# Altium PCB God68_PCB_Altium.pcbdoc
Units mil, origin at the board's own origin, x right, y up, seen from the top; angles counter-clockwise.
Board outline 14584.13 x 6241.48 mil, 2 copper layers (Top Layer, Bottom Layer); 92 components, 37 nets, 716 pads, 124 vias.
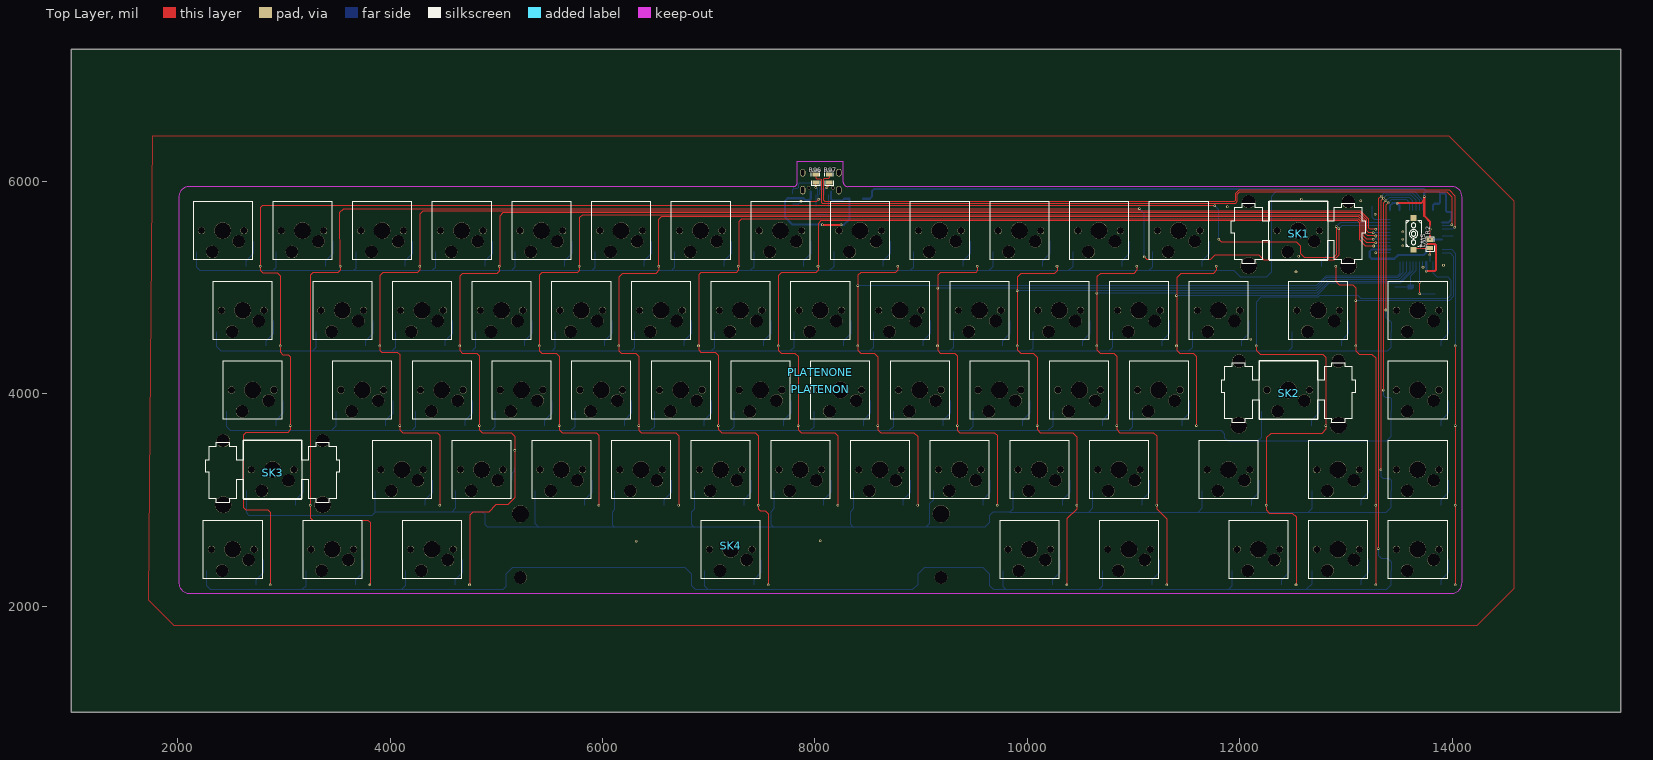
[diagram p0: Top Layer view]
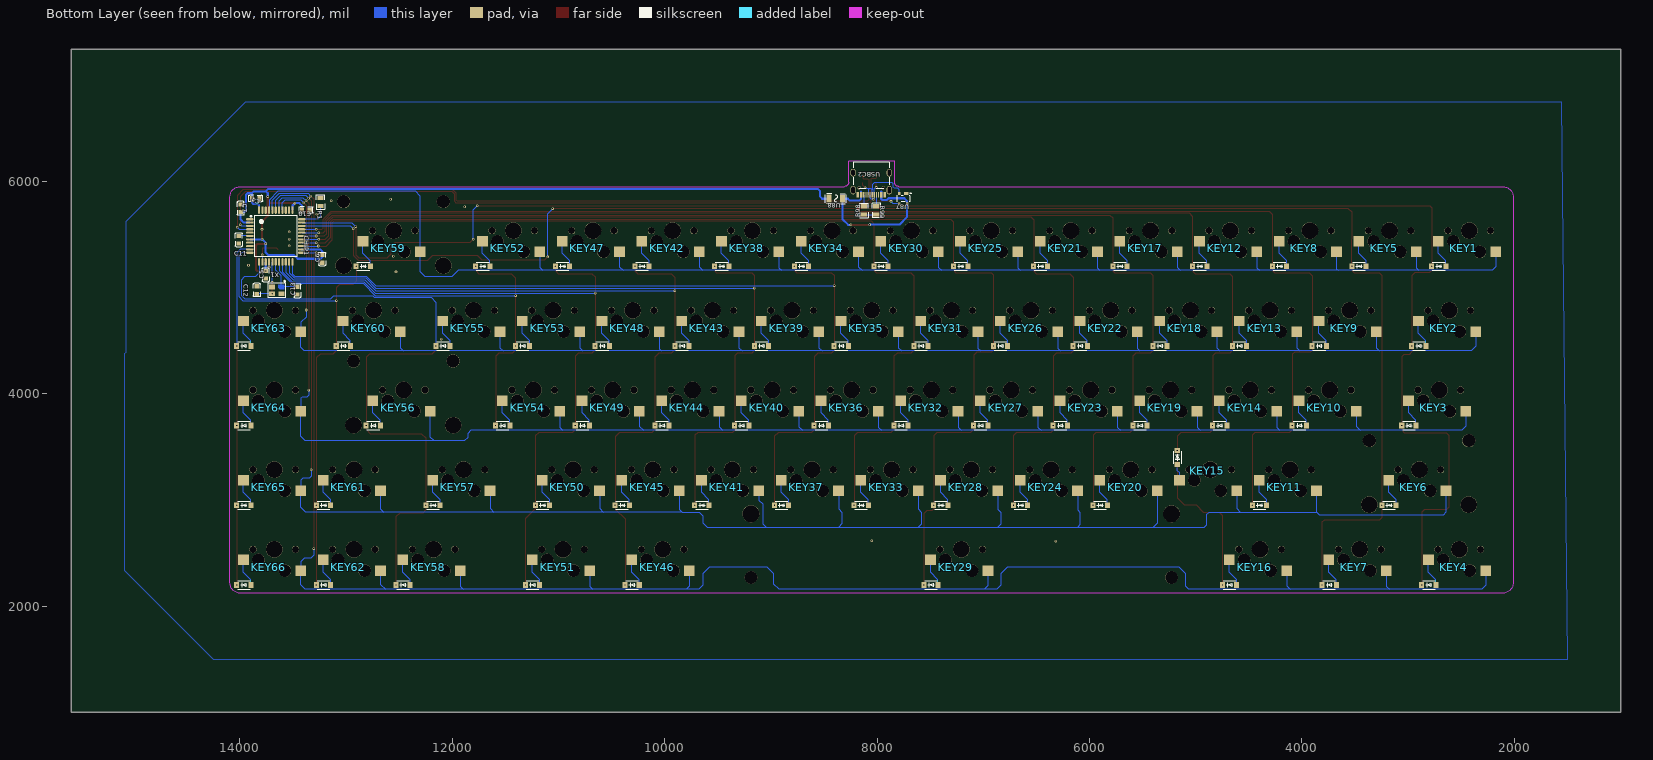
[diagram p1: Bottom Layer view, seen from below]

## Layer stack, top to bottom
Top Layer: signal copper (thickness not stored)
Dielectric: dielectric 12.6, FR-4, Dk 4.8
Bottom Layer: signal copper (thickness not stored)

## Board outline
15584.13,1000 1000,1000 1000,7241.48 15584.13,7241.48

## Components (designator, comment, footprint, x,y, rotation, side; value= is the part's Value field where it differs from the comment)
C4 "100nF" C0603 13849.57,5837.71 r180 bottom
C5 "100nF" C0603 13755.06,5119.02 r270 bottom
C6 "100nF" C0603 13222.58,5268.8 r270 bottom
C7 "470nF" C0603 13990.89,5744.59 r90 bottom
C10 "100nF" C0603 13376.13,5729.43 r180 bottom
C11 "1uF" C0603 14008.01,5449.9 r270 bottom
C12 "22pF" C0603 13838.72,4975.5 r90 bottom
C13 "22pF" C0603 13456.83,4969.59 r270 bottom
CHIP1 "ATMEGA32U4-AU" QFP-44_L10.0-W10.0-P0.80-LS13.2-BL 13660.18,5484.75 r90 bottom
KEY1 "凯华热插拔" 凯华热插拔 2150.36,5809.55 r0 top
KEY2 "凯华热插拔" 凯华热插拔 2337.84,5059.63 r0 top
KEY3 "凯华热插拔" 凯华热插拔 2431.58,4309.71 r0 top
KEY4 "凯华热插拔" 凯华热插拔 2244.1,2809.87 r0 top
KEY5 "凯华热插拔" 凯华热插拔 2900.28,5809.55 r0 top
KEY6 "凯华热插拔" 凯华热插拔 2619.06,3559.79 r0 top
KEY7 "凯华热插拔" 凯华热插拔 3181.5,2809.87 r0 top
KEY8 "凯华热插拔" 凯华热插拔 3650.2,5809.55 r0 top
KEY9 "凯华热插拔" 凯华热插拔 3275.24,5059.63 r0 top
KEY10 "凯华热插拔" 凯华热插拔 3462.72,4309.71 r0 top
KEY11 "凯华热插拔" 凯华热插拔 3837.68,3559.79 r0 top
KEY12 "凯华热插拔" 凯华热插拔 4400.12,5809.55 r0 top
KEY13 "凯华热插拔" 凯华热插拔 4025.16,5059.63 r0 top
KEY14 "凯华热插拔" 凯华热插拔 4212.64,4309.71 r0 top
KEY15 "凯华热插拔" "凯华热插拔 COPY" 4587.63,3559.77 r0 top
KEY16 "凯华热插拔" 凯华热插拔 4118.9,2809.87 r0 top
KEY17 "凯华热插拔" 凯华热插拔 5150.05,5809.55 r0 top
KEY18 "凯华热插拔" 凯华热插拔 4775.08,5059.63 r0 top
KEY19 "凯华热插拔" 凯华热插拔 4962.56,4309.71 r0 top
KEY20 "凯华热插拔" 凯华热插拔 5337.52,3559.79 r0 top
KEY21 "凯华热插拔" 凯华热插拔 5899.97,5809.55 r0 top
KEY22 "凯华热插拔" 凯华热插拔 5525.01,5059.63 r0 top
KEY23 "凯华热插拔" 凯华热插拔 5712.49,4309.71 r0 top
KEY24 "凯华热插拔" 凯华热插拔 6087.45,3559.79 r0 top
KEY25 "凯华热插拔" 凯华热插拔 6649.89,5809.55 r0 top
KEY26 "凯华热插拔" 凯华热插拔 6274.93,5059.63 r0 top
KEY27 "凯华热插拔" 凯华热插拔 6462.41,4309.71 r0 top
KEY28 "凯华热插拔" 凯华热插拔 6837.37,3559.79 r0 top
KEY29 "凯华热插拔" 凯华热插拔 6931.11,2809.87 r0 top
KEY30 "凯华热插拔" 凯华热插拔 7399.81,5809.55 r0 top
KEY31 "凯华热插拔" 凯华热插拔 7024.85,5059.63 r0 top
KEY32 "凯华热插拔" 凯华热插拔 7212.33,4309.71 r0 top
KEY33 "凯华热插拔" 凯华热插拔 7587.29,3559.79 r0 top
KEY34 "凯华热插拔" 凯华热插拔 8149.73,5809.55 r0 top
KEY35 "凯华热插拔" 凯华热插拔 7774.77,5059.63 r0 top
KEY36 "凯华热插拔" 凯华热插拔 7962.25,4309.71 r0 top
KEY37 "凯华热插拔" 凯华热插拔 8337.21,3559.79 r0 top
KEY38 "凯华热插拔" 凯华热插拔 8899.65,5809.55 r0 top
KEY39 "凯华热插拔" 凯华热插拔 8524.69,5059.63 r0 top
KEY40 "凯华热插拔" 凯华热插拔 8712.17,4309.71 r0 top
KEY41 "凯华热插拔" 凯华热插拔 9087.13,3559.79 r0 top
KEY42 "凯华热插拔" 凯华热插拔 9649.57,5809.55 r0 top
KEY43 "凯华热插拔" 凯华热插拔 9274.61,5059.63 r0 top
KEY44 "凯华热插拔" 凯华热插拔 9462.09,4309.71 r0 top
KEY45 "凯华热插拔" 凯华热插拔 9837.05,3559.79 r0 top
KEY46 "凯华热插拔" 凯华热插拔 9743.31,2809.87 r0 top
KEY47 "凯华热插拔" 凯华热插拔 10399.49,5809.55 r0 top
KEY48 "凯华热插拔" 凯华热插拔 10024.53,5059.63 r0 top
KEY49 "凯华热插拔" 凯华热插拔 10212.01,4309.71 r0 top
KEY50 "凯华热插拔" 凯华热插拔 10586.97,3559.79 r0 top
KEY51 "凯华热插拔" 凯华热插拔 10680.72,2809.87 r0 top
KEY52 "凯华热插拔" 凯华热插拔 11149.42,5809.55 r0 top
KEY53 "凯华热插拔" 凯华热插拔 10774.45,5059.63 r0 top
KEY54 "凯华热插拔" 凯华热插拔 10961.93,4309.71 r0 top
KEY55 "凯华热插拔" 凯华热插拔 11524.38,5059.63 r0 top
KEY56 "凯华热插拔" 凯华热插拔 12180.56,4309.71 r0 top
KEY57 "凯华热插拔" 凯华热插拔 11618.12,3559.79 r0 top
KEY58 "凯华热插拔" 凯华热插拔 11899.34,2809.87 r0 top
KEY59 "凯华热插拔" 凯华热插拔 12274.3,5809.55 r0 top
KEY60 "凯华热插拔" 凯华热插拔 12461.78,5059.63 r0 top
KEY61 "凯华热插拔" 凯华热插拔 12649.26,3559.79 r0 top
KEY62 "凯华热插拔" 凯华热插拔 12649.26,2809.87 r0 top
KEY63 "凯华热插拔" 凯华热插拔 13399.18,5059.63 r0 top
KEY64 "凯华热插拔" 凯华热插拔 13399.18,4309.71 r0 top
KEY65 "凯华热插拔" 凯华热插拔 13399.18,3559.79 r0 top
KEY66 "凯华热插拔" 凯华热插拔 13399.18,2809.87 r0 top
PLATENON "_" ?#1 8050.36,4042.88 r0 top
PLATENONE "_" ?#2 8051.48,4201.58 r0 top
R1 "1K" R0805#1 13238.92,5805.61 r270 bottom
R2 "10K" R0805#2 13788.53,5410.43 r90 top
R96 "22" R0805#2 8006.07,6026.68 r270 top
R97 "22" R0805#2 8134.02,6026.68 r270 top
R98 "5.1K" R0805#1 8123.72,5725.47 r270 bottom
R99 "5.1K" R0805#1 8005.58,5725.47 r90 bottom
SK1 "卫星轴" "凯华热插拔 2U" 12274.3,5809.55 r0 top
SK2 "卫星轴" "凯华热插拔 2U" 12180.56,4309.71 r0 top
SK3 "卫星轴" "凯华热插拔 2U" 2619.06,3559.79 r0 top
SK4 "卫星轴6.25" 6.25U 6931.11,2809.87 r0 top
SW1 "K2-1107ST-A4SW-06" KEY-SMD_L6.2-W3.6-LS8.0 13634.95,5504.95 r270 top
U87 "PRTR5V0U2X" SOT-143_L2.9-W1.3-P1.92-LS2.3-BL 7753.54,5835.74 r180 bottom
U88 "MF-NSMF050-2" F1206 8387.56,5835.74 r180 bottom
USBC2 "TYPE-C-31-M-12" USB-C_SMD-TYPE-C-31-M-12 8055.27,5977.46 r180 bottom
X1 "16MHz" OSC-SMD_4P-L3.2-W2.5-BL 13650.7,4973.32 r180 bottom

## Footprints (in the part's own frame and the unit in brackets; to place one, negate y for a bottom-side part, rotate by r counter-clockwise, add the part's x,y. Pads: shape width x height; smd on the part's side, far side on the other; paste and mask are expansions set on the pad)
6.25U [mil]
  round 120 hole 120 unplated: ""(-1704.41,-540.59) ""(2255.59,-540.59)
  round 160 hole 160 unplated: ""(-1704.41,59.41) ""(2255.59,59.41)
  silkscreen extent 0,-551 551,0
C0603 [mm]
  rect 1x1.1 smd: 1(0.9,0) 2(-0.9,0)
  silkscreen extent -1.65,-0.8 1.65,0.8
F1206 [mm]
  rect 1.2x1.9 smd: 1(1.6,0) 2(-1.6,0)
  silkscreen extent -2.5,-1.2 2.5,1.2
KEY-SMD_L6.2-W3.6-LS8.0 [mm]
  rect 1.4x1.5 smd: 1(-3.8,0) 2(3.8,0)
  silkscreen extent -3.1,-1.8 3.1,1.8
OSC-SMD_4P-L3.2-W2.5-BL [mm]
  round 0 smd: 1(1.1,0.8)
  rect 1.4x1.15 smd: 2(-1.1,0.8) 3(-1.1,-0.8) 4(1.1,-0.8)
  Top Layer region: 1.8,0.225 0.762,0.225 0.4,0.604 0.4,1.375 1.8,1.375
  silkscreen extent -2.1,-1.7 2.1,2.35
QFP-44_L10.0-W10.0-P0.80-LS13.2-BL [mm]
  oval 0.5x1.8 smd: 1(4,6.2) 2(3.2,6.2) 3(2.4,6.2) 4(1.6,6.2) 5(0.8,6.2) 6(0,6.2) 7(-0.8,6.2) 8(-1.6,6.2) 9(-2.4,6.2) 10(-3.2,6.2) 11(-4,6.2) 23(-4,-6.2) 24(-3.2,-6.2) 25(-2.4,-6.2) 26(-1.6,-6.2) 27(-0.8,-6.2) 28(0,-6.2) 29(0.8,-6.2) 30(1.6,-6.2) 31(2.4,-6.2) 32(3.2,-6.2) 33(4,-6.2)
  oval 1.8x0.5 smd: 12(-6.2,4) 13(-6.2,3.2) 14(-6.2,2.4) 15(-6.2,1.6) 16(-6.2,0.8) 17(-6.2,0) 18(-6.2,-0.8) 19(-6.2,-1.6) 20(-6.2,-2.4) 21(-6.2,-3.2) 22(-6.2,-4) 34(6.2,-4) 35(6.2,-3.2) 36(6.2,-2.4) 37(6.2,-1.6) 38(6.2,-0.8) 39(6.2,0) 40(6.2,0.8) 41(6.2,1.6) 42(6.2,2.4) 43(6.2,3.2) 44(6.2,4)
  silkscreen extent -5,-5 5,6.08
R0805#1 [mm]
  rect 1x1.55 smd: 1(1,0) 2(-1,0)
  silkscreen extent -1.75,-1.02 1.75,1.02
R0805#2 [mm]
  rect 1x1.55 smd: 1(-1,0) 2(1,0)
  silkscreen extent -1.75,-1.02 1.75,1.02
SOT-143_L2.9-W1.3-P1.92-LS2.3-BL [mm]
  rect 1.1x0.7 smd: 1(0.75,1.2)
  rect 0.6x0.7 smd: 2(-0.95,1.2) 3(-0.95,-1.2) 4(0.95,-1.2)
  silkscreen extent -1.55,-0.7 1.9,1.4
USB-C_SMD-TYPE-C-31-M-12 [mm]
  oval 1.2x2 hole 0.8 slot 1.6 at 90 deg: 0(-4.32,-1.556) 0(4.32,-1.556)
  oval 1.2x1.8 hole 0.8 slot 1.4 at 90 deg: 0(-4.32,2.624) 0(4.32,2.624)
  rect 0.3x1.3 smd: A1(3.35,-2.623) A4(2.55,-2.623) A5(1.25,-2.623) A6(0.25,-2.623) A7(-0.25,-2.623) A8(-1.25,-2.624) A9(-2.55,-2.623) A12(-3.35,-2.623) B1(-3.05,-2.623) B4(-2.25,-2.623) B5(-1.75,-2.623) B6(-0.75,-2.623) B7(0.75,-2.623) B8(1.75,-2.624) B9(2.25,-2.623) B12(3.05,-2.623)
  round 0.75 hole 0.75 unplated: ""(-2.89,-1.026) ""(2.89,-1.026)
  silkscreen extent -4.32,-1.22 4.32,5.23
凯华热插拔 [mm]
  rect 1.2x1.4 smd far side: 0(12.572,-15.494) 2(15.972,-15.494)
  rect 2.55x2.5 smd far side: 0(14.351,-9.525) 1(0.635,-12.065)
  round 1.7 hole 1.7 unplated: ""(1.905,-6.985) ""(12.065,-6.985)
  round 3 hole 3 unplated: ""(4.445,-12.065) ""(10.795,-9.525)
  round 4 hole 4 unplated: ""(6.985,-6.985)
  Bottom Layer lines w0.254: 12.574,-15.494 12.574,-14.201 14.352,-12.423 14.352,-9.525
  silkscreen extent -0.01,-13.98 13.98,0.01
"凯华热插拔 2U" [mm]
  round 4 hole 4 unplated: ""(-4.832,-15.383) ""(18.968,-15.383)
  round 3.15 hole 3.15 unplated: ""(-4.832,-0.044) ""(18.968,-0.044)
  silkscreen extent -9.1,-14.75 23.1,0
"凯华热插拔 COPY" [mm]
  rect 2.55x2.5 smd far side: 0(14.351,-9.525) 1(0.635,-12.065)
  rect 1.4x1.2 smd far side: 0(14.875,-5.781) 2(14.875,-2.381)
  round 1.7 hole 1.7 unplated: ""(1.905,-6.985) ""(12.065,-6.985)
  round 3 hole 3 unplated: ""(4.445,-12.065) ""(10.795,-9.525)
  round 4 hole 4 unplated: ""(6.985,-6.985)
  Bottom Layer lines w0.254: 14.352,-9.526 14.352,-7.735 14.875,-7.212 14.875,-6.545
  silkscreen extent -0.01,-13.98 13.98,0.01
?#1 [mil]
?#2 [mil]
  Keep-Out Layer lines w10: -6039.39,-1981.74 -6039.39,1650.16 ; -5940.96,-2080.16 5940.96,-2080.16 ; -5940.96,1748.59 -255.89,1748.59 ; -216.51,1787.96 -216.51,1984.76 216.59,1984.76 216.59,1787.96 ; 255.92,1748.59 5940.96,1748.59 ; 6039.39,-1981.74 6039.39,1650.16
  Keep-Out Layer lines w10: -6039.39,-1981.74 ccw(c-5940.96,-1981.74) -5940.96,-2080.16 ; -6039.39,1650.16 cw(c-5940.96,1650.16) -5940.96,1748.59 ; -255.89,1748.59 ccw(c-255.89,1787.96) -216.52,1787.96 ; 216.55,1787.96 ccw(c255.92,1787.96) 255.92,1748.59 ; 5940.96,-2080.16 ccw(c5940.96,-1981.74) 6039.39,-1981.74 ; 5940.96,1748.59 cw(c5940.96,1650.16) 6039.39,1650.16

## Via types
v1: diameter 24, hole 12, Top Layer to Bottom Layer, 124 vias

## Nets (pads, with @x,y where several pads share a name; then routed paths per layer and width w, separated by ;. In a path a pad name is that pad's centre, name@x,y a point inside that pad or via, vN(x,y) a via of type N, cw(c..) or ccw(c..) an arc to the next point about the centre after c; other vN are vias at no path point)
+5V: C4.2 C5.2 C6.2 C7.2 C10.2 CHIP1.2 CHIP1.7 CHIP1.14 CHIP1.24 CHIP1.34 CHIP1.44 R2.2 U88.2 | length 8686.6
  Top Layer w20: v1(13479.36,5794.38) 13705.83,5794.39 13735.37,5823.92 ; v1(13735.37,5855.43) 13735.37,5823.92 ; v1(13755.06,5154.46) 13833.76,5154.48 13845.66,5166.28 13845.66,5396.68 13831.86,5410.48 v1@13755.06,5410.48 ; v1(13788.53,5453.75) 13788.53,5545.56 v1(13789.56,5546.59) 13789.56,5620.18 13735.36,5674.28 13735.36,5823.88
  Bottom Layer w20: U88.2@8450.56,5835.78 8515.56,5835.78 8535.26,5855.38 8535.26,5904.68 8558.86,5928.28 13729.46,5928.28 13753.06,5904.68 ; C10.2@13411.56,5729.48 13411.56,5767.88 13438.06,5794.38 v1(13479.36,5794.38) 13502.66,5771.08 CHIP1.34@13502.66,5728.88 ; CHIP1.24 13241.66,5358.78 13222.56,5339.68 13222.56,5304.28 13222.56,5287.28 13239.16,5270.68 13453.76,5270.68 13489.26,5306.08 13731.36,5306.08 13755.06,5329.68 v1@13755.06,5410.48 ; v1(13735.37,5855.43) 13735.36,5886.98 13753.06,5904.68 ; CHIP1.14 v1(13755.06,5154.46) ; v1(13755.06,5410.44) 13755.06,5420.28 v1(13788.53,5453.75) 13789.03,5453.25 CHIP1.7 ; CHIP1.44@13817.66,5728.88 13817.66,5774.08 13831.46,5787.88 13872.76,5787.88 13885,5800.12 C4.2 ; C4.2 13884.96,5886.98 ; CHIP1.2 13961.36,5610.73 13990.89,5640.26 C7.2@13990.89,5709.15 ; C7.2 13952.56,5709.18 13940.16,5721.58 13940.16,5873.18 13926.36,5886.98 13884.96,5886.98 ; 13753.06,5904.68 13867.26,5904.68 13884.96,5886.98
CHIP1_6: C11.2 CHIP1.6 | length 104
  Bottom Layer w10: CHIP1.6 13904.87,5485.35 C11.2
CHIP1_13: CHIP1.13 R2.1 SW1.2 | length 291.6
  Top Layer w10: SW1.2@13634.95,5355.35 13650.98,5371.38 R2.1@13788.56,5371.38 ; v1(13787.54,5306.21) 13788.53,5307.2 R2.1
  Bottom Layer w10: CHIP1.13 13786.16,5304.83 v1(13787.54,5306.21)
CHIP1_16: C12.2 CHIP1.16 X1.3 | length 446.6
  Top Layer w10: v1(13693.64,4941.44) v1(13693.64,5047.75)
  Bottom Layer w10: CHIP1.16 13693.66,5240.68 v1@13693.66,5047.78 ; X1.3 13695.77,4940.06 C12.2
CHIP1_17: C13.2 CHIP1.17 X1.1 | length 408.3
  Bottom Layer w10: C13.2 13457.04,5004.82 X1.1 13607.39,5110.31 13660.18,5163.1 CHIP1.17
CHIP1_33: CHIP1.33 R1.1 | length 286.1
  Bottom Layer w10: R1.1 13238.92,5667.92 13264.56,5642.28 CHIP1.33@13416.06,5642.28
COL0: CHIP1.32 KEY1.2 KEY2.2 KEY3.2 KEY4.2 | length 15758.4
  Top Layer w10: v1(2779.22,5199.55) 2780.28,5200.61 2780.28,5750.5 2798,5768.22 11762.55,5768.22 v1(11762.55,5770.18) ; v1@2779.26,5199.58 2779.26,5160.98 2799.96,5140.28 2937.76,5140.28 2966.66,5111.38 2966.66,4449.68 2966.66,4392.88 2990.96,4368.58 3040.16,4368.58 3060.46,4348.28 3060.46,3699.68 3060.46,3658.58 3036.16,3634.38 2642.46,3634.38 2618.86,3610.78 2618.86,2929.68 2642.56,2905.98 2849.16,2905.98 2872.96,2882.18 v1(2872.96,2199.87) ; v1@11799.95,5455.22 11831.44,5423.73 12534.2,5423.73 12571.6,5386.32 12571.6,5319.4 12610.97,5280.03 12876.72,5280.03 12906.24,5309.55 v1(12906.24,5573.33)
  Bottom Layer w10: v1(11762.55,5770.18) 11799.94,5732.78 v1@11799.94,5455.22 ; v1(12906.24,5573.33) 12914.12,5581.21 12943.64,5610.73 CHIP1.32
  other v1: 3060.44,3699.71 2966.7,4449.63 11799.95,5455.22
COL1: CHIP1.31 KEY5.2 KEY6.2 KEY7.2 | length 14956
  Top Layer w10: v1(3810.36,2199.87) 3811.76,2201.28 3811.76,2789.88 3792.06,2809.58 3270.46,2809.58 3247.96,2832.08 3247.96,2949.78 3247.96,5115.78 3272.46,5140.28 3508.66,5140.28 3529.16,5160.78 3529.16,5199.58 3528.26,5707.18 3563.66,5742.58 v1(11053.89,5742.62) ; v1(11101.13,5287.9) 11126.72,5262.31 11723.18,5262.31 11764.51,5303.65 12181.83,5303.65 12227.11,5258.37 12884.59,5258.37 12931.83,5305.61 v1(12931.84,5553.65)
  Bottom Layer w10: v1(11053.89,5742.62) 11101.13,5695.38 v1(11101.13,5287.9) ; v1(12931.84,5553.65) 12957.43,5579.24 CHIP1.31
  other v1: 3247.92,2949.79 3529.14,5199.55
COL2: CHIP1.30 KEY8.2 KEY9.2 KEY10.2 KEY11.2 | length 12866.4
  Top Layer w10: v1(4279.06,5199.55) 4279.06,5690.23 4307.84,5719 13136.56,5719 13215.3,5640.26 13215.3,5557.58 13225.15,5547.74 v1(13278.29,5547.74) ; v1@4279.06,5199.58 4279.06,5162.68 4256.66,5140.28 3931.86,5140.28 3904.06,5112.48 3904.06,4449.68 3904.06,4410.08 3921.96,4392.28 4069.66,4392.28 4091.56,4370.28 v1(4091.58,3699.71) 4091.56,3661.68 4118.86,3634.38 4443.66,3634.38 4469.26,3608.78 4469.26,2952.48 v1@4466.56,2949.78
  Bottom Layer w10: v1(13278.29,5547.74) CHIP1.30
  other v1: 4466.54,2949.79 3904.1,4449.63
COL3: CHIP1.29 KEY12.2 KEY13.2 KEY14.2 KEY15.2 KEY16.2 | length 13137.1
  Top Layer w10: v1@4748.76,2199.88 4748.76,2856.78 4778.36,2886.28 4927.66,2886.28 4994.46,2953.08 5107.16,2953.08 5173.26,3019.18 v1(5173.26,3466.07) ; v1@5028.96,5199.58 5028.96,5154.68 5004.66,5130.38 4679.86,5130.38 4654.06,5104.58 4654.06,4449.68 4654.06,4408.18 4679.86,4382.38 4817.66,4382.38 4841.46,4358.58 v1(4841.5,3699.71) 4841.46,3659.78 4866.86,3634.38 5138.76,3634.38 5172.16,3600.98 5172.16,3467.17 v1(5173.26,3466.07) ; v1(5028.98,5199.55) 5030.28,5200.84 5030.28,5669.79 5061.77,5701.28 13130.65,5701.28 13195.91,5636.03 13195.91,5531.69 13211.36,5516.25 v1(13256.64,5516.25)
  Bottom Layer w10: v1(13256.64,5516.25) CHIP1.29
  other v1: 4747.76,2199.87 4654.02,4449.63
COL4: CHIP1.28 KEY17.2 KEY18.2 KEY19.2 KEY20.2 | length 11359.5
  Top Layer w10: v1(5966.39,2949.79) 5966.36,3607.68 5939.76,3634.38 5618.86,3634.38 5591.46,3661.78 5591.46,3699.68 5593.26,3701.58 5593.26,4354.88 5565.76,4382.38 5427.96,4382.38 5403.96,4406.38 5403.96,4449.68 5403.96,5116.28 5427.96,5140.28 5762.56,5140.28 5778.86,5156.58 5778.86,5199.58 5780.26,5200.88 5780.26,5654.08 5807.76,5681.58 13126.76,5681.58 13179.86,5628.48 13179.86,5506.38 13201.56,5484.78 v1@13278.66,5484.78
  Bottom Layer w10: v1(13278.66,5484.75) CHIP1.28
  other v1: 5591.43,3699.71 5403.94,4449.63 5778.91,5199.55
COL5: CHIP1.27 KEY21.2 KEY22.2 KEY23.2 KEY24.2 | length 10601.3
  Top Layer w10: v1@6716.36,2949.78 6716.36,3605.78 6687.76,3634.38 6362.96,3634.38 6341.36,3655.98 v1(6341.35,3699.71) 6341.36,4354.78 6313.76,4382.38 6175.96,4382.38 6153.86,4404.48 6153.86,4449.68 6153.86,5098.48 6185.76,5130.38 6500.76,5130.38 6530.26,5159.88 6530.26,5199.58 6528.86,5199.58 6526.36,5202.08 6526.36,5636.28 6553.96,5663.88 13120.76,5663.88 13162.16,5622.58 13162.16,5486.68 13195.66,5453.28 v1@13256.66,5453.28
  Bottom Layer w10: v1(13256.64,5453.25) CHIP1.27@13416.03,5453.25
  other v1: 6716.31,2949.79 6153.87,4449.63 6528.83,5199.55
COL6: CHIP1.26 KEY25.2 KEY26.2 KEY27.2 KEY28.2 KEY29.2 | length 10661.7
  Top Layer w10: v1(7559.97,2199.87) 7559.96,2870.38 7534.26,2896.18 7484.96,2896.18 7466.26,2914.98 7466.26,2949.78 7466.26,3603.88 7435.76,3634.38 7120.86,3634.38 7091.26,3663.88 v1(7091.27,3699.71) 7091.26,4362.78 7061.76,4392.28 6923.96,4392.28 6903.76,4412.38 6903.76,4449.68 6903.76,5120.08 6923.96,5140.28 7258.66,5140.28 7278.76,5160.38 7278.76,5199.58 7280.26,5201.08 7280.26,5620.58 7303.86,5644.18 13116.86,5644.18 13144.46,5616.68 13144.46,5470.98 13193.66,5421.78 v1@13278.96,5421.78
  Bottom Layer w10: v1(13278.92,5421.76) CHIP1.26
  other v1: 7466.23,2949.79 6903.79,4449.63 7278.75,5199.55
COL7: CHIP1.25 KEY30.2 KEY31.2 KEY32.2 KEY33.2 | length 9081
  Top Layer w10: v1(8216.15,2949.79) 8216.16,3602.08 8183.86,3634.38 7868.86,3634.38 7841.16,3662.08 v1(7841.19,3699.71) 7841.16,4350.98 7809.76,4382.38 7681.86,4382.38 7653.66,4410.58 7653.66,4449.68 7653.66,5112.08 7681.86,5140.28 8006.66,5140.28 8028.66,5162.28 8028.66,5199.58 8028.66,5601.28 8053.86,5626.48 13111.06,5626.48 13126.76,5610.78 13126.76,5447.38 13183.88,5390.26 v1(13258.61,5390.26)
  Bottom Layer w10: v1(13258.61,5390.26) CHIP1.25
  other v1: 7653.71,4449.63 8028.67,5199.55
COL8: CHIP1.22 KEY34.2 KEY35.2 KEY36.2 KEY37.2 | length 8342.9
  Top Layer w10: v1@8778.56,5199.58 8778.56,5164.18 8754.66,5140.28 8429.86,5140.28 8403.66,5113.98 v1(8403.66,5017.93) 8403.66,4449.68 8403.66,4408.68 8429.86,4382.38 8557.86,4382.38 8591.16,4349.08 8591.16,3699.68 8591.16,3660.18 8616.86,3634.38 8931.86,3634.38 8966.06,3600.18 v1(8966.07,2949.79)
  Bottom Layer w10: v1@8404.26,5018.18 12719.26,5018.18 12807.86,5106.78 13479.06,5106.78 13502.66,5130.38 CHIP1.22
  other v1: 8591.11,3699.71 8403.63,4449.63 8778.59,5199.55
COL9: CHIP1.21 KEY38.2 KEY39.2 KEY40.2 KEY41.2 | length 7650.2
  Top Layer w10: v1@9153.56,4992.62 9154.28,4993.35 v1(9154.28,4994.59) ; v1@9528.46,5199.58 9528.46,5156.18 9512.56,5140.28 9177.96,5140.28 9153.56,5115.88 9153.56,4449.68 9153.56,4406.78 9177.96,4382.38 9315.76,4382.38 9341.06,4357.08 9341.06,3699.68 9341.06,3658.28 9364.96,3634.38 9689.76,3634.38 9715.96,3608.08 v1(9715.99,2949.79)
  Bottom Layer w10: v1(9154.28,4994.59) 12719.26,4994.58 12814.06,5089.48 13487.26,5089.48 13534.16,5136.38 CHIP1.21
  other v1: 9341.03,3699.71 9153.55,4449.63 9528.51,5199.55
COL10: CHIP1.20 KEY42.2 KEY43.2 KEY44.2 KEY45.2 KEY46.2 | length 7694.7
  Top Layer w10: v1(9902.31,4970.97) 9902.31,4970.15 v1@9903.46,4969 ; 9935.76,4382.38 10053.86,4382.38 10090.96,4345.38 v1(10090.95,3699.71) 10090.96,3666.18 10122.76,3634.38 10427.96,3634.38 10465.96,3596.38 10465.96,2949.78 10465.96,2914.48 10372.16,2820.78 v1(10372.17,2199.87) ; 9935.79,4382.39 9903.46,4414.72 9903.46,4449.68 9903.46,5098.08 9935.76,5130.38 10250.76,5130.38 10278.46,5158.08 v1@10278.46,5199.58
  Bottom Layer w10: v1(9902.31,4970.97) 12719.26,4970.98 12821.56,5073.38 13496.76,5073.38 13565.66,5142.28 CHIP1.20
  other v1: 10465.91,2949.79 9903.47,4449.63 10278.43,5199.55
COL11: CHIP1.19 KEY47.2 KEY48.2 KEY49.2 KEY50.2 KEY51.2 | length 6996.1
  Top Layer w10: v1@10652.31,4943.41 v1(10652.31,4947.35) ; v1@11028.36,5199.58 11028.36,5159.98 10998.76,5130.38 10683.86,5130.38 10652.36,5098.88 10652.36,4450.68 10653.36,4449.68 10653.36,4412.78 10683.86,4382.38 10811.76,4382.38 10840.86,4353.28 v1(10840.87,3699.71) 10840.86,3664.28 10870.86,3634.38 11185.76,3634.38 11215.86,3604.28 11215.86,2949.78 11215.86,2915.38 11309.56,2821.58 v1(11309.58,2199.87)
  Bottom Layer w10: v1@10652.26,4947.38 12721.16,4947.38 12829.46,5055.58 13504.66,5055.58 13597.16,5148.18 CHIP1.19
  other v1: 11215.83,2949.79 10653.39,4449.63 11028.35,5199.55
COL12: CHIP1.18 KEY52.2 KEY53.2 KEY54.2 | length 4398.6
  Top Layer w10: v1(11402.31,4923.73) 11402.31,4921.76 v1@11404.28,4919.79 ; v1(11590.8,3699.71) 11590.76,4351.38 11559.76,4382.38 11431.86,4382.38 11403.36,4410.88 11403.36,4449.68 11403.36,5092.08 11441.66,5130.38 11746.86,5130.38 11778.26,5161.88 v1@11778.26,5199.58
  Bottom Layer w10: v1(11402.31,4923.73) 12723.16,4923.68 12837.36,5037.88 13510.56,5037.88 13628.66,5155.98 CHIP1.18
  other v1: 11403.32,4449.63 11778.28,5199.55
COL13: CHIP1.12 KEY55.2 KEY56.2 KEY57.2 KEY58.2 | length 6365.1
  Top Layer w10: v1@12153.26,4449.68 12153.26,4409.08 12189.76,4372.58 12780.26,4372.58 12809.46,4343.38 12809.46,3699.68 12809.46,3663.48 12770.46,3624.48 12288.16,3624.48 12246.96,3583.38 v1(12246.98,2949.79) 12246.96,2907.78 12278.26,2876.48 12494.86,2876.48 12528.16,2843.08 v1(12528.2,2199.87)
  Bottom Layer w10: KEY55.2@12153.26,4449.68 12153.26,4861.68 12197.56,4905.98 12733.06,4905.98 12746.76,4919.78 13112.96,4919.78 13140.16,4892.58 13953.76,4892.58 13986.96,4925.68 13986.96,5067.38 13955.46,5098.88 13855.06,5098.88 13817.66,5136.28 CHIP1.12
  other v1: 12809.42,3699.71 12153.24,4449.63
COL14: CHIP1.11 KEY59.2 KEY60.2 KEY61.2 KEY62.2 | length 4734.8
  Top Layer w10: v1@12903.16,5199.58 12903.16,5056.78 12935.76,5024.08 13063.76,5024.08 13090.66,4997.18 13090.66,4449.68 13090.66,4406.68 13124.76,4372.58 13242.86,4372.58 13278.16,4337.28 v1@13278.16,2199.88
  Bottom Layer w10: v1(13089.32,4876.48) 13969.23,4876.48 14010.58,4917.82 14010.58,5295.77 13979.08,5327.27 CHIP1.11
  other v1: 13278.12,2199.87 13278.12,2949.79 13090.64,4449.63 12903.16,5199.55
COL15: CHIP1.10 KEY63.2 KEY64.2 KEY65.2 KEY66.2 | length 3262
  Top Layer w10: v1(14028.04,2199.87) v1(14028.04,4449.63)
  Bottom Layer w10: CHIP1.10 13992.86,5358.78 14028.06,5323.58 KEY63.2@14028.06,4449.68
  other v1: 14028.04,2949.79 14028.04,3699.71
D+: CHIP1.4 R97.1 | length 6762.5
  Top Layer w11: R97.1@8134.06,6066.08 8134.06,6034.58 8124.16,6024.68 8086.76,6024.68 8078.86,6016.88 8078.86,5825.88 8092.66,5812.08 11948.96,5812.08 11959.56,5822.68 11959.56,5885.68 11992.26,5918.38 13968.67,5918.38 14023.76,5863.29 v1(14023.76,5568.02)
  Bottom Layer w11: CHIP1.4 14003.49,5547.74 v1(14023.76,5568.02)
D-: CHIP1.3 R96.1 | length 6704.5
  Top Layer w11: R96.1@8006.06,6066.38 8006.06,6034.38 8015.86,6024.38 8051.36,6024.38 8059.16,6016.88 8059.16,5804.28 8069.06,5794.38 11958.76,5794.38 11976.56,5812.38 11976.56,5877.38 12000.16,5900.38 13946.96,5900.38 13994.26,5853.48 v1@13994.26,5591.68
  Bottom Layer w11: CHIP1.3 13985.77,5579.24 13994.24,5587.7 v1(13994.24,5591.64)
GND: C4.1 C5.1 C6.1 C7.1 C10.1 C11.1 C12.1 C13.1 CHIP1.5 CHIP1.15 CHIP1.23 CHIP1.35 CHIP1.43 R1.2 R98.1 R99.2 SW1.1 U87.1 USBC2.0 USBC2.A1 USBC2.A12 USBC2.B1 USBC2.B12 X1.2 X1.4 | length 306.5
  Bottom Layer w10: R99.2 R98.1 ; v1(13278.56,5327.27) CHIP1.23 ; CHIP1.15 v1(13723.55,5189.91)
  other v1: 6318.14,2612.49 8050.86,2616.42 12103.07,4514.54 12528.37,5146.59 13916.51,5209.6 12552,5294.26 13532.56,5390.75 13532.56,5455.72 13532.56,5522.67 13272.65,5690.03 11882.54,5758.95 13138.76,5816.05 12579.56,5831.8
R96_2: R96.2 U87.3 USBC2.A7 USBC2.B7 | length 502.9
  Top Layer w10: v1(7868.55,5810.14) 8015.42,5810.14 v1(8035.11,5829.83)
  Top Layer w11: v1(8006.06,5942.03) R96.2
  Bottom Layer w10: U87.3 7846.9,5788.49 v1(7868.55,5810.14)
  Bottom Layer w11: v1(8006.06,5942.03) 8009.99,5938.09 8015.91,5938.09 8025.74,5928.27 USBC2.B7 8025.76,5839.18 v1(8035.11,5829.83) 8055.21,5829.83 8055.26,5829.78 8065.16,5839.68 USBC2.A7@8065.16,5874.18
R97_2: R97.2 U87.2 USBC2.A6 USBC2.B6 | length 626.8
  Top Layer w11: v1(8112.36,5940.06) 8134.02,5961.72 R97.2
  Bottom Layer w10: U87.2@7790.96,5882.98 7790.96,5919.58 7803.66,5932.18 7833.16,5932.18 7846.06,5945.18 7846.06,5974.68 7856.76,5985.38 8027.96,5985.38 8045.46,5967.88 8045.46,5918.38
  Bottom Layer w11: USBC2.A6@8045.46,5874.18 8045.46,5918.38 8055.26,5928.28 8074.96,5928.28 ; USBC2.B6 8084.76,5918.38 8074.96,5928.28 ; v1(8112.36,5940.06) 8100.58,5928.28 8074.96,5928.28
R98_2: R98.2 USBC2.B5 | length 109.3
  Bottom Layer w10: R98.2@8123.76,5764.88 USBC2.B5
R99_1: R99.1 USBC2.A5 | length 109.3
  Bottom Layer w10: R99.1@8005.56,5764.88 USBC2.A5@8005.56,5874.18
ROW0: CHIP1.41 KEY1.1 KEY5.1 KEY8.1 KEY12.1 KEY17.1 KEY21.1 KEY25.1 KEY30.1 KEY34.1 KEY38.1 KEY42.1 KEY47.1 KEY52.1 KEY59.1 | length 14840.3
  Bottom Layer w10: KEY1.1@2175.36,5334.58 2175.36,5193.98 2209.46,5159.98 11943.66,5159.98 12002.76,5100.88 12250.76,5100.88 12299.36,5149.48 12299.36,5334.58 12299.36,5860.08 12343.26,5904.08 13640.46,5904.08 13723.16,5821.38 CHIP1.41@13723.16,5728.88 ; 2898.39,5159.94 2898.46,5159.98 2925.26,5186.88 KEY5.1 ; 3658.19,5159.98 3675.21,5177 KEY8.1 ; 4398.05,5159.98 4425.14,5187.07 KEY12.1 ; 5143.52,5159.98 5175.06,5191.52 KEY17.1@5175.06,5334.53 ; 5901.39,5159.98 5924.98,5183.57 KEY21.1 ; 6650.98,5159.98 6674.9,5183.9 KEY25.1 ; 7392.8,5159.98 7424.82,5192 KEY30.1 ; 8141.04,5159.98 8174.74,5193.68 KEY34.1 ; 8897.26,5159.98 8924.66,5187.38 KEY38.1@8924.66,5334.53 ; 9638.58,5159.98 9674.58,5195.98 KEY42.1 ; 10387.67,5159.98 10424.51,5196.82 KEY47.1 ; 11145.05,5159.98 11174.43,5189.36 KEY52.1
ROW1: CHIP1.37 KEY2.1 KEY9.1 KEY13.1 KEY18.1 KEY22.1 KEY26.1 KEY31.1 KEY35.1 KEY39.1 KEY43.1 KEY48.1 KEY53.1 KEY55.1 KEY60.1 KEY63.1 | length 15444.3
  Top Layer w10: v1(13374.75,4787.9) 13374.76,5774.18 v1(13396.4,5795.77)
  Bottom Layer w10: KEY2.1@2362.86,4584.58 2362.86,4445.48 2406.26,4402.08 13390.56,4402.08 13424.16,4435.78 KEY63.1 ; 3271.15,4402.08 3300.25,4431.18 KEY9.1 ; 4018.72,4402.08 4050.17,4433.52 KEY13.1 ; 4771.66,4402.08 4800.1,4430.52 KEY18.1 ; 5525.02,4402.08 5550.02,4427.08 KEY22.1 ; 6273.66,4402.08 6299.94,4428.36 KEY26.1 ; 7022.23,4402.08 7049.86,4429.71 KEY31.1@7049.86,4584.61 ; 7767.35,4402.08 7799.78,4434.51 KEY35.1 ; 8517.81,4402.08 8549.7,4433.97 KEY39.1 ; 9268.28,4402.08 9299.62,4433.41 KEY43.1 ; 10027.34,4402.08 10049.54,4424.28 KEY48.1 ; 10770.08,4402.08 10799.47,4431.46 KEY53.1@10799.47,4584.6 ; 11518.13,4402.08 11549.39,4433.34 KEY55.1 ; 12458.52,4402.08 12486.79,4430.35 KEY60.1 ; v1(13374.75,4787.9) 13374.75,4720.97 13424.19,4671.53 KEY63.1 ; v1(13396.4,5795.77) 13425.93,5825.3 13571.59,5825.3 13597.19,5799.71 CHIP1.37
ROW2: CHIP1.38 KEY3.1 KEY10.1 KEY14.1 KEY19.1 KEY23.1 KEY27.1 KEY32.1 KEY36.1 KEY40.1 KEY44.1 KEY49.1 KEY54.1 KEY56.1 KEY64.1 | length 16287.8
  Top Layer w10: v1(13351.13,4033.97) 13351.13,5793.81 v1(13374.75,5817.43)
  Bottom Layer w10: KEY3.1 2456.56,3692.28 2494.86,3654.08 11825.56,3654.08 11855.06,3624.48 11855.06,3585.18 11884.66,3555.58 12170.06,3555.58 ; 3450.3,3654.08 3487.73,3691.51 KEY10.1 ; 4207.52,3654.08 4237.66,3684.22 KEY14.1@4237.66,3834.68 ; 4957.31,3654.08 4987.58,3684.35 KEY19.1 ; 5707.63,3654.08 5737.5,3683.95 KEY23.1 ; 6456.33,3654.08 6487.42,3685.17 KEY27.1 ; 7206.5,3654.08 7237.34,3684.92 KEY32.1 ; 7956.03,3654.08 7987.26,3685.3 KEY36.1@7987.26,3834.68 ; 8700.46,3654.08 8737.18,3690.8 KEY40.1 ; 9450.42,3654.08 9487.1,3690.76 KEY44.1 ; 10196.8,3654.08 10237.03,3694.3 KEY49.1 ; 10958.6,3654.08 10986.95,3682.43 KEY54.1@10986.95,3834.68 ; KEY56.1@12205.56,3834.68 12205.56,3591.18 12170.06,3555.58 ; v1@13351.16,4033.98 13351.16,3984.78 13366.86,3968.98 13410.16,3968.98 13424.16,3954.98 KEY64.1 13424.16,3599.18 13380.66,3555.58 12170.06,3555.58 ; v1@13374.76,5817.48 13404.26,5846.98 13597.16,5846.98 13628.66,5815.48 CHIP1.38@13628.66,5728.88
ROW3: CHIP1.39 KEY6.1 KEY11.1 KEY15.1 KEY20.1 KEY24.1 KEY28.1 KEY33.1 KEY37.1 KEY41.1 KEY45.1 KEY50.1 KEY57.1 KEY61.1 KEY65.1 | length 18117.5
  Top Layer w10: v1(13327.5,3283.97) 13327.5,5815.45 v1(13351.13,5839.08)
  Bottom Layer w10: KEY6.1 2644.06,2884.78 2672.06,2856.78 3833.46,2856.78 3862.96,2886.28 ; KEY11.1 3862.96,2886.28 ; 4579.33,2886.28 4612.62,2919.57 KEY15.1 ; KEY20.1 5362.54,2779 5399.06,2742.48 ; KEY24.1@6112.46,3084.76 6112.46,2908.15 6090.59,2886.28 6090.59,2764.7 6112.81,2742.48 ; KEY28.1 6862.38,2914.64 6834.01,2886.28 6834.01,2773.13 6864.66,2742.48 ; KEY33.1 7612.3,2916.63 7581.94,2886.28 7581.94,2773.4 7612.87,2742.48 ; KEY37.1 8362.22,2918.2 8330.3,2886.28 8330.3,2774.64 8362.46,2742.48 ; 9041.56,2742.48 9077.26,2778.18 9077.26,2963.48 9112.16,2998.38 KEY41.1@9112.16,3084.78 ; KEY45.1@9862.06,3084.76 9862.06,2913.38 9832.89,2884.21 ; 10575.37,2886.28 10611.99,2922.9 KEY50.1 ; 11608.31,2886.28 11643.13,2921.1 KEY57.1 ; 12642.69,2886.28 12674.27,2917.86 KEY61.1@12674.27,3084.76 ; v1(13327.5,3283.97) 13327.46,3220.98 13343.26,3205.18 13404.26,3205.18 13424.16,3185.28 KEY65.1 13424.16,2929.88 13378.49,2884.21 9832.89,2884.21 ; v1@13351.16,5839.08 13378.66,5866.68 13614.86,5866.68 13660.16,5821.38 CHIP1.39@13660.16,5728.88 ; 3862.96,2886.28 4874.76,2886.28 4896.16,2864.88 4896.16,2766.48 4920.16,2742.48 9598.54,2742.48 9641.82,2785.76 9641.82,2850.73 9675.29,2884.21 9832.89,2884.21
ROW4: CHIP1.40 KEY4.1 KEY7.1 KEY16.1 KEY29.1 KEY46.1 KEY51.1 KEY58.1 KEY62.1 KEY66.1 | length 17515.2
  Top Layer w10: v1@13301.96,2541.88 13301.96,5833.18 v1(13329.47,5860.73)
  Bottom Layer w10: KEY4.1@2269.16,2334.88 2269.16,2196.68 2307.86,2157.98 5063.76,2157.98 5093.26,2187.48 5093.26,2305.58 5155.96,2368.38 6772.66,2368.38 6835.36,2305.58 6835.36,2197.38 6874.76,2157.98 8922.06,2157.98 8971.26,2207.18 8971.26,2305.58 9032.06,2366.38 9579.76,2366.38 9640.56,2305.58 9640.56,2197.38 9679.86,2157.98 13380.66,2157.98 13424.16,2201.48 KEY66.1 ; 3174.87,2157.98 3206.51,2189.62 KEY7.1@3206.51,2334.84 ; 4111.41,2157.98 4143.91,2190.48 KEY16.1@4143.91,2334.84 ; KEY29.1@6956.12,2334.84 6956.12,2192.81 6990.95,2157.98 ; KEY46.1@9768.32,2334.84 9768.32,2187.63 9797.98,2157.98 ; 10674.33,2157.98 10705.73,2189.38 KEY51.1@10705.73,2334.84 ; 11892.85,2157.98 11924.35,2189.48 KEY58.1@11924.35,2334.84 ; 12626.93,2157.98 12674.27,2205.32 KEY62.1@12674.27,2334.84 ; v1(13301.91,2541.84) 13301.91,2478.85 13329.47,2451.29 13392.46,2451.29 13424.19,2419.56 KEY66.1@13424.19,2334.84 ; v1(13329.47,5860.73) 13355.06,5886.28 13626.76,5886.28 13691.66,5821.38 CHIP1.40@13691.66,5728.88
S$3351: 
S$3364: 
VCC: U87.4 U88.1 USBC2.A4 USBC2.A9 USBC2.B4 USBC2.B9 | length 1592.9
  Top Layer w20: v1(8070.55,5591.58) 8072.53,5589.61 v1(8245.79,5589.61)
  Bottom Layer w20: 7960.26,5902.68 7960.26,5833.78 7950.46,5823.88 7907.16,5823.88 7891.36,5839.68 7743.76,5839.68 7716.16,5812.08 7716.16,5788.48 7716.16,5664.48 7789.06,5591.58 v1(8070.55,5591.58) ; 8149.31,5900.72 8149.36,5834.38 8165.76,5817.98 8257.56,5817.98 8275.36,5835.78 8324.56,5835.78 8324.56,5642.78 8271.36,5589.58 v1(8245.79,5589.61)
pads on no net: CHIP1.1 CHIP1.8 CHIP1.9 CHIP1.36 CHIP1.42 KEY1. KEY1.0 KEY2. KEY2.0 KEY3. KEY3.0 KEY4. KEY4.0 KEY5. KEY5.0 KEY6. KEY6.0 KEY7. KEY7.0 KEY8. KEY8.0 KEY9. KEY9.0 KEY10. KEY10.0 KEY11. KEY11.0 KEY12. KEY12.0 KEY13. KEY13.0 KEY14. KEY14.0 KEY15. KEY15.0 KEY16. KEY16.0 KEY17. KEY17.0 KEY18. KEY18.0 KEY19. KEY19.0 KEY20. KEY20.0 KEY21. KEY21.0 KEY22. KEY22.0 KEY23. KEY23.0 KEY24. KEY24.0 KEY25. KEY25.0 KEY26. KEY26.0 KEY27. KEY27.0 KEY28. KEY28.0 KEY29. KEY29.0 KEY30. KEY30.0 KEY31. KEY31.0 KEY32. KEY32.0 KEY33. KEY33.0 KEY34. KEY34.0 KEY35. KEY35.0 KEY36. KEY36.0 KEY37. KEY37.0 KEY38. KEY38.0 KEY39. KEY39.0 KEY40. KEY40.0 KEY41. KEY41.0 KEY42. KEY42.0 KEY43. KEY43.0 KEY44. KEY44.0 KEY45. KEY45.0 KEY46. KEY46.0 KEY47. KEY47.0 KEY48. KEY48.0 KEY49. KEY49.0 KEY50. KEY50.0 KEY51. KEY51.0 KEY52. KEY52.0 KEY53. KEY53.0 KEY54. KEY54.0 KEY55. KEY55.0 KEY56. KEY56.0 KEY57. KEY57.0 KEY58. KEY58.0 KEY59. KEY59.0 KEY60. KEY60.0 KEY61. KEY61.0 KEY62. KEY62.0 KEY63. KEY63.0 KEY64. KEY64.0 KEY65. KEY65.0 KEY66. KEY66.0 SK1. SK2. SK3. SK4. USBC2. USBC2.A8 USBC2.B8

## Polygon pours and split planes (outlines as drawn)
GND on Bottom Layer (solid): 1555.13,6741.48 13948.02,6741.48 15072.32,5617.18 15072.32,4386.55 15084.13,4374.74 15084.13,2336.82 14247.31,1500 1500,1500
GND on Top Layer (solid): 1763.85,6426.44 13967.71,6426.44 14578.1,5816.05 14578.1,2165.52 14227.62,1815.04 1968.62,1815.04 1726.43,2057.23